# Altium PCB PC110-itx.PcbDoc (part 10 of 16)
Units mm, origin at the board's own origin, x right, y up, seen from the top; angles counter-clockwise.
Board outline 170 x 170 mm, 16 copper layers (FC1, FC2, FC3, FC4, IP1, IC1, IC2, IP2, IP3, IC3, IC4, IP4, BC4, BC3, BC2, BC1), stack 3.903 mm thick; 935 components, 1357 nets, 4698 pads, 3240 vias.
Unrouted connection lines stored in the file: 552.
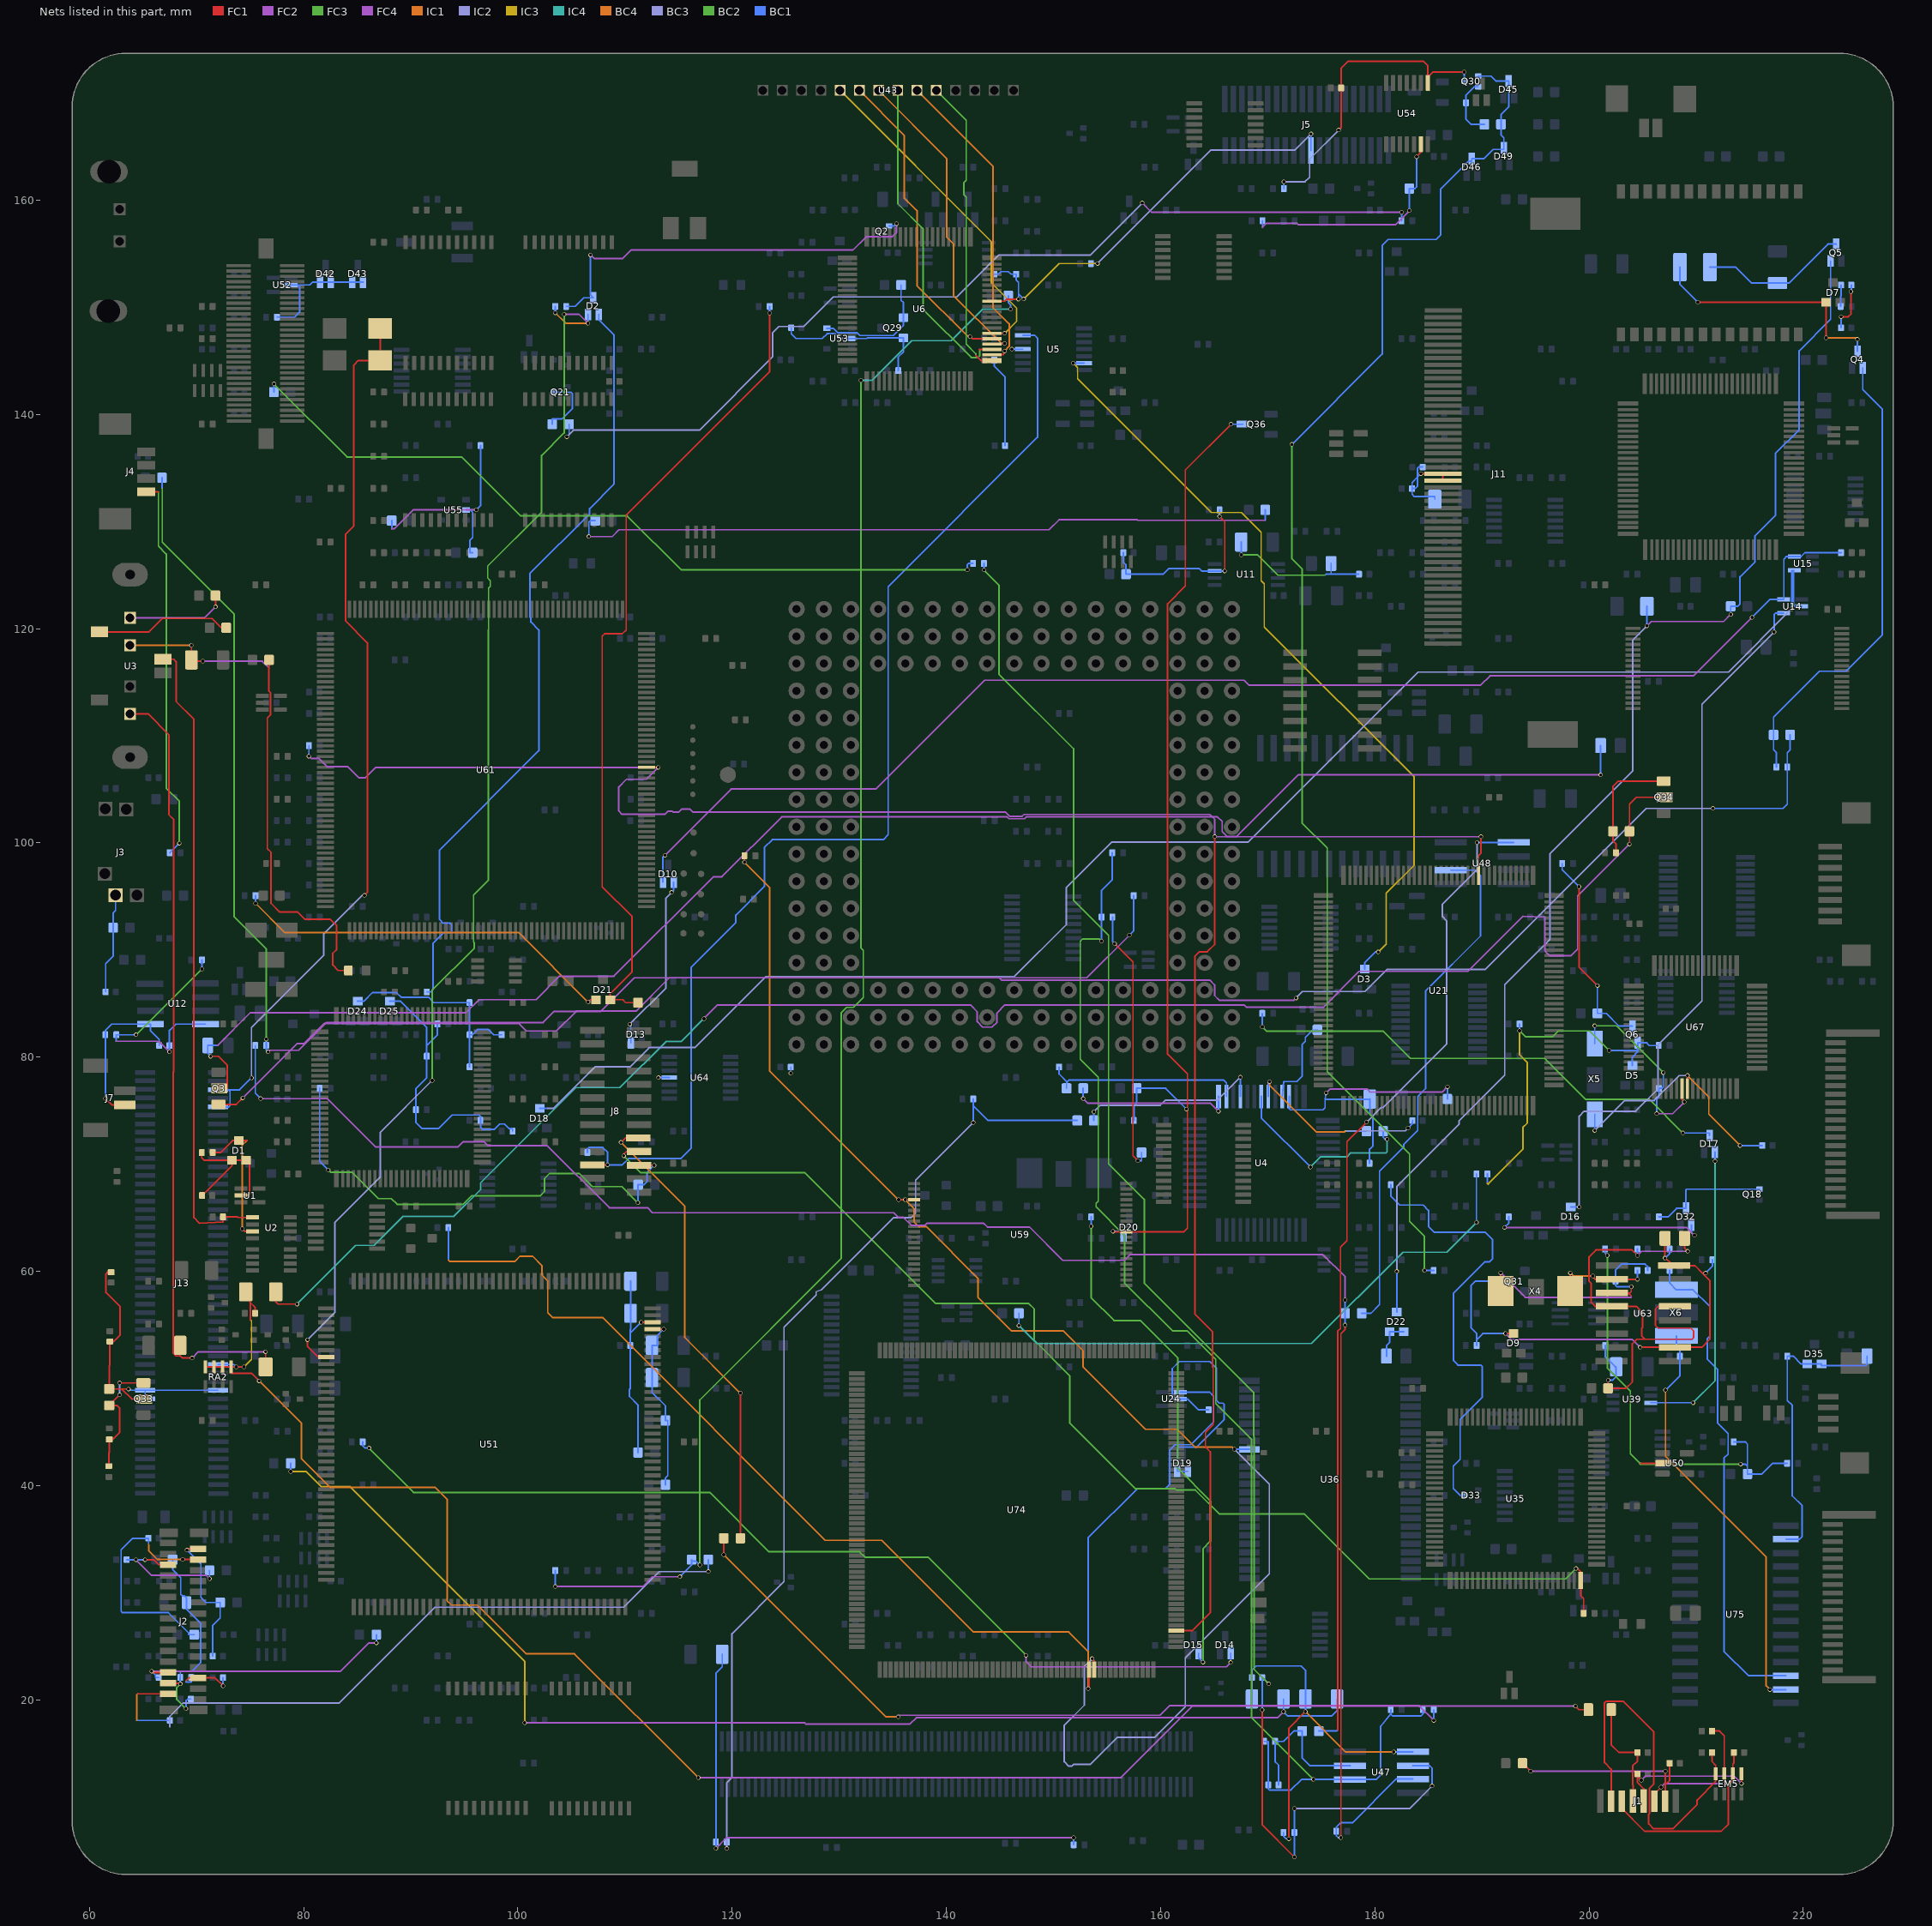
[diagram p23: the nets of this part, all layers, seen from the top]

## Via types
v1: diameter 0.4, hole 0.3, FC1 to BC1, 3240 vias

## Nets (pads, with @x,y where several pads share a name; then routed paths per layer and width w, separated by ;. In a path a pad name is that pad's centre, name@x,y a point inside that pad or via, vN(x,y) a via of type N, cw(c..) or ccw(c..) an arc to the next point about the centre after c; other vN are vias at no path point) (continued)
M38_SEG4: U6.66 U43.5 | length 31.2
  FC1 w0.15: U6.66@144.26,147.575 v1(145.44,147.575)
  IC3 w0.15: U43.5@130.07,170.26 144.196,156.134 144.196,152.286 146.558,149.923 146.558,148.693 v1(145.44,147.575)
M38_SEG5: U6.65 U43.6 | length 29.5
  FC1 w0.15: v1(142.215,147.278) 142.418,147.075 U6.65@144.26,147.075
  IC1 w0.15: U43.6@131.87,170.26 136.068,166.062 136.068,160.223 137.262,159.029 137.262,152.028 142.011,147.278 v1(142.215,147.278)
M38_SEG6: U6.64 U43.7 | length 29.9
  FC1 w0.15: U6.64@144.26,146.575 145.381,146.575 v1(145.44,146.634)
  IC1 w0.15: U43.7@133.67,170.26 140.03,163.9 140.03,156.566 140.666,155.93 140.666,151.091 145.123,146.634 v1(145.44,146.634)
M38_SEG7: U6.63 U43.8 | length 30.4
  FC1 w0.15: 143.104,146.05 143.079,146.075 U6.63@144.26,146.075
  FC3 w0.15: U43.8@135.47,170.26 135.47,159.678 137.846,157.302 137.846,149.784 142.316,145.313 142.951,145.313 143.104,145.466 143.104,146.05
M38_SEG8: U6.62 U43.9 | length 29.5
  FC1 w0.15: U6.62@144.26,145.575 145.321,145.575 v1(145.44,145.923)
  IC1 w0.15: U43.9@137.27,170.26 144.348,163.182 144.348,149.988 145.872,148.464 145.872,146.355 v1(145.44,145.923)
M38_SEG9: U6.61 U43.10 | length 28.2
  FC1 w0.15: 142.748,145.533 143.256,145.025 U6.61@144.26,145.025
  FC3 w0.15: U43.10@139.07,170.26 141.859,167.471 141.859,161.85 141.63,161.62 141.63,160.527 141.859,160.298 141.859,146.558 142.748,145.669 142.748,145.533
M38_VREF: C216.1 C223.2 J5.31 R41.1 U6.72 | length 43.2
  FC1 w0.15: U6.72@144.26,150.575 145.44,150.575 145.631,150.766 v1(146.735,150.766)
  IC2 w0.15: v1(154.108,154.09) 164.686,164.668 172.516,164.668 v1(174.04,166.192)
  IC3 w0.15: v1(147.218,150.774) 150.534,154.09 v1(154.108,154.09)
  BC1 w0.15: C216.1@144.48,153.09 144.839,153.09 145.085,153.336 145.795,153.336 146.042,153.09 C223.2@146.52,153.09 146.52,152.54 146.735,152.325 146.735,151.258 ; v1(146.735,150.766) 146.735,151.258 ; v1(147.218,150.774) 146.735,151.258 ; R41.1@153.51,154.09 v1(154.108,154.09) ; J5.31@174.04,164.65 v1(174.04,166.192)
MEMCS16#: R316.2 U21.119 U61.27 U74.160 | length 208.1
  FC1 w0.15: U61.27@112.028,107.057 v1(113.108,107.057) ; U74.160@161.458,26.469 162.966,26.469 164.643,28.146 164.643,43.162 164.186,43.619 164.186,44.984 164.908,45.706 164.908,51.013 164.846,51.075 164.846,54.381 163.195,56.032 163.195,89.408 163.626,89.839 164.363,89.839 165.049,90.526 v1(165.049,100.584) ; U21.119@189.682,96.966 189.682,98.826 189.916,99.06 v1(189.916,100.584)
  FC2 w0.15: v1(113.108,107.057) 113.102,107.057 111.989,105.943 110.134,105.943 109.419,105.228 109.419,102.976 109.728,102.667 113.716,102.667 114.023,102.974 114.406,102.974 114.496,102.885 115.027,102.885 115.317,103.174 116.027,103.174 116.316,102.885 145.5,102.885 145.897,102.488 147.067,102.488 147.243,102.665 164.592,102.665 165.049,102.207 v1(165.049,100.584) v1(189.916,100.584)
  FC4 w0.15: v1(80.49,108.102) 80.693,107.899 81.407,107.899 82.169,107.137 84.099,107.137 85.141,106.096 85.776,106.096 86.737,107.057 v1(113.108,107.057)
  BC1 w0.15: v1(80.49,108.102) R316.2@80.49,109.09
MEMR#: R322.1 U36.16 U59.24 U74.145 | length 138.2
  FC1 w0.15: v1(121.154,98.196) R322.1@121.154,98.806 ; v1(135.545,66.69) v1(136.169,66.69) U59.24@137,66.69 ; v1(153.619,23.851) 153.808,23.662 U74.145@153.808,22.819
  IC1 w0.15: v1(121.154,98.196) 123.495,95.856 123.495,78.74 v1(135.545,66.69)
  BC4 w0.15: v1(136.169,66.69) 136.984,65.876 136.984,64.618 137.415,64.186 138.125,64.186 142.951,59.36 142.951,57.582 146.075,54.458 150.901,54.458 152.75,52.61 152.75,51.112 158.598,45.264 161.543,45.264 163.194,43.612 166.681,43.612 v1(166.885,43.409)
  BC3 w0.15: v1(153.619,23.851) 152.883,23.114 152.883,19.507 151.003,17.628 151.003,14.224 151.409,13.818 151.714,13.818 151.892,13.995 153.467,13.995 155.981,16.51 159.461,16.51 162.306,19.355 162.306,23.927 170.155,31.775 170.155,40.139 166.904,43.39 v1(166.885,43.409)
  BC1 w0.15: v1@166.904,43.39 U36.16@168.29,43.39
MEMW#: R324.1 U24.1 U74.144 | length 123.6
  FC1 w0.15: v1@153.308,21.126 U74.144@153.308,22.819
  BC4 w0.15: 93.51,61.074 93.652,60.932 99.715,60.932 100.198,61.414 101.374,61.414 102.235,60.554 102.235,59.665 102.794,59.106 102.794,56.134 103.226,55.702 107.899,55.702 128.701,34.9 133.984,34.9 142.545,26.34 151.435,26.34 153.238,24.536 v1(153.238,21.056)
  BC1 w0.15: 93.51,61.074 R324.1@93.51,64.09 ; v1(153.238,21.056) v1@153.238,21.196 ; v1@153.308,21.126 v1@153.238,21.196 ; U24.1@161.85,48.74 164.569,48.74 164.922,48.387 164.922,45.923 162.824,43.825 161.351,43.825 160.833,43.307 160.833,40.114 160.426,39.708 157.818,39.708 153.238,35.128 v1@153.238,21.196
MIC_in_pin: C6.2 J3.4 L13.2 | length 9.4
  BC1 w0.15: C6.2@61.52,86.09 61.52,88.722 62.213,89.415 L13.2@62.213,92.09 62.213,93.472 62.442,93.702 J3.4@62.442,95.125
MIC_J17: J4.1 R30.2 | length 36
  FC1 w0.15: J4.1@65.3,132.77 66.442,132.77
  FC3 w0.15: 66.442,132.77 66.446,132.766 66.446,127.711 67.183,126.975 67.183,105.101 68.398,103.886 v1(68.398,99.974)
  BC1 w0.15: R30.2@67.49,99.09 67.513,99.09 v1(68.398,99.974)
MN192_VSEN#: C226.2 J8.16 R277.2 U5.11 | length 48.1
  FC1 w0.15: J8.16@111.3,69.9 v1(112.725,69.9)
  BC2 w0.15: v1(82.296,69.469) 82.499,69.266 84.506,69.266 86.97,66.802 88.189,66.802 88.722,66.269 94.895,66.269 95.682,67.056 102.083,67.056 102.489,67.462 102.489,68.682 102.946,69.139 105.74,69.139 106.959,67.92 109.697,67.92 v1(111.201,66.416)
  BC1 w0.15: R277.2@81.49,77.09 81.49,70.275 v1(82.296,69.469) ; v1(111.201,66.416) 111.225,66.439 C226.2@111.225,68.09 111.76,68.09 112.065,68.395 112.065,69.24 v1(112.725,69.9) ; v1(146.12,146.09) U5.11@147.137,146.09
MN195_U1RD#: J8.3 R128.2 U5.13 | length 110.1
  FC1 w0.15: J8.3@106.95,69.95 v1(108.382,69.95)
  BC1 w0.15: R128.2@106.49,71.09 106.49,71.425 106.642,71.577 107.925,71.577 108.382,71.12 v1(108.382,69.95) 109.747,69.95 110.333,70.536 115.189,70.536 116.18,71.526 116.18,88.415 120.348,92.584 120.348,93.271 123.012,95.936 123.012,99.568 123.749,100.305 134.112,100.305 134.569,100.762 134.569,123.927 148.514,137.871 148.514,147.117 148.241,147.39 U5.13@147.137,147.39
Modem_Audio_Out: C89.1 R32.1 | length 76.1
  FC1 w0.15: v1(119.225,33.553) C89.1@119.225,35.09
  IC1 w0.15: v1(119.225,33.553) 134.363,18.415 v1(135.509,18.415)
  FC4 w0.15: v1(135.509,18.415) 135.662,18.568 159.945,18.568 160.833,19.456 184.138,19.456 v1(185.51,18.085)
  BC1 w0.15: v1(185.51,18.085) R32.1@185.51,19.09
Modem_VSDA#: J8.17 R127.1 U35.75 | length 116.2
  FC1 w0.15: v1(109.88,70.794) 109.88,70.946 110.134,71.2 J8.17@111.3,71.2 ; v1(198.78,32.258) 198.933,32.258 199.22,31.971 U35.75@199.22,31.15 199.22,29.734 199.49,29.464 R127.1@199.49,28.09
  BC2 w0.15: v1(109.88,70.794) 111.459,69.215 126.796,69.215 139.013,56.998 147.701,56.998 148.209,56.49 148.209,53.569 151.515,50.262 151.515,45.868 157.676,39.708 161.359,39.708 161.468,39.599 163.246,39.599 165.499,37.345 173.424,37.345 179.476,31.293 197.815,31.293 v1(198.78,32.258)
Net-(C1--): C1.2 U2.1 U3.1 | length 60.1
  FC1 w0.15: U3.1@66.85,117.155 67.869,117.155 68.097,116.926 68.097,113.208 69.748,111.557 69.748,65.024 70.282,64.491 72.48,64.618 C1.2@72.48,65.09 73.838,65.09 73.888,65.04 U2.1@75.25,65.04
Net-(C4-+): C4.1 D1.1 D1.3 R4.1 U1.2 | length 13.5
  FC1 w0.15: R4.1@70.49,71.09 70.49,70.589 70.714,70.365 D1.3@73.3,70.365 ; C4.1@70.52,67.09 70.536,67.09 73.3,69.854 D1.3@73.3,70.365 ; U1.2@74.15,67.09 74.786,67.09 74.955,67.259 74.955,70.365 D1.1@74.625,70.365 D1.3@73.3,70.365
Net-(C7-+): C7.1 J1.7 L1.2 | length 18.6
  FC1 w0.15: L1.2@193.788,14.09 193.802,14.09 v1(194.557,13.335) ; J1.7@207.11,10.55 207.11,12.09 ; v1(207.11,13.335) 207.11,12.09 ; C7.1@207.52,14.09 207.52,12.5 207.11,12.09
  FC2 w0.15: v1(194.557,13.335) v1(207.11,13.335)
Net-(C10-+): C10.1 C23.1 L7.1 | length 114.7
  IC3 w0.15: v1(78.787,41.326) 80.213,41.326 81.61,39.929 84.303,39.929 100.635,23.597 v1(100.635,17.856)
  FC4 w0.15: v1(100.635,17.856) 126.771,17.856 126.874,17.753 136.61,17.753 137.195,18.338 170.916,18.338 v1(171.475,18.898)
  BC1 w0.15: v1(78.787,41.326) L7.1@78.787,42.09 ; C10.1@171.475,20.09 v1(171.475,18.898) 171.881,18.491 175.971,18.491 176.475,18.995 C23.1@176.475,20.09
Net-(C10--): C10.2 C23.2 C154.2 R227.2 U47.1 | length 36.9
  FC1 w0.15: v1(171.983,7.036) 171.983,17.368 v1(173.525,18.91)
  BC4 w0.15: v1(173.525,18.91) 177.297,15.138 v1(181.762,15.138)
  BC1 w0.15: C10.2@168.525,20.09 168.525,21.082 168.52,21.087 C154.2@168.52,22.09 168.52,22.758 168.926,23.165 173.119,23.165 173.525,22.758 C23.2@173.525,20.09 v1(173.525,18.91) ; R227.2@171.474,7.627 171.474,7.266 171.704,7.036 v1(171.983,7.036) ; v1(181.762,15.138) 181.782,15.158 U47.1@183.544,15.158
Net-(C11-+): C11.1 C50.2 R72.1 U11.7 | length 17.5
  FC1 w0.15: v1(165.506,130.48) 165.989,129.997 v1(165.989,125.39)
  BC1 w0.15: C50.2@156.52,127.09 156.52,126.214 156.775,125.959 C11.1@156.775,125.09 160.244,125.09 160.757,125.603 163.617,125.603 163.83,125.39 U11.7@165.05,125.39 v1(165.989,125.39) ; v1(165.506,130.48) 165.51,130.483 R72.1@165.51,131.09
Net-(C12-+): C12.1 U4.1 | length 15.5
  FC2 w0.15: v1(152.775,76.124) 153.207,75.692 164.668,75.692 v1(165.4,74.96)
  BC1 w0.15: v1(152.775,76.124) C12.1@152.775,77.09 ; v1(165.4,74.96) U4.1@165.4,76.34
Net-(C12--): C12.2 C24.2 U4.2 | length 18.7
  BC1 w0.15: C24.2@150.52,79.09 150.52,78.429 151.225,77.724 151.225,77.622 ; C12.2@151.225,77.09 151.225,77.622 ; U4.2@166.15,76.34 166.15,77.597 165.871,77.876 151.479,77.876 151.225,77.622
Net-(C13-+): C13.1 U48.6 | length 48.9
  BC1 w0.15: C13.1@178.775,56.09 179.629,56.09 180.442,56.903 180.442,69.353 182.716,71.628 182.716,71.871 183.998,73.152 183.998,76.328 184.734,77.064 184.734,86.182 189.865,91.313 189.865,96.972 189.382,97.455 U48.6@187.1,97.455
Net-(C13--): C13.2 R217.2 R218.2 U47.3 | length 177.1
  FC1 w0.15: v1(176.835,7.137) 176.835,54.197 177.225,54.587 v1(177.225,54.993)
  FC2 w0.15: v1(75.997,76.124) 82.22,76.124 86.715,71.629 94.412,71.629 94.894,72.111 96.825,72.111 97.207,71.729 102.744,71.729 108.534,65.938 112.116,65.938 112.573,65.481 135.103,65.481 135.534,65.05 135.991,65.05 136.741,64.3 137.994,64.3 138.185,64.491 143.485,64.491 143.84,64.135 147.777,64.135 150.876,61.036 156.616,61.036 157.15,61.57 175.158,61.57 177.225,59.503 v1(177.225,57.328)
  BC1 w0.15: R217.2@75.49,81.09 75.49,76.631 v1(75.997,76.124) ; v1(176.835,7.137) 176.579,7.137 176.401,7.315 R218.2@176.401,7.747 176.401,8.128 176.807,8.534 177.902,8.534 181.975,12.608 U47.3@183.544,12.608 ; v1(177.225,54.993) C13.2@177.225,56.09 v1(177.225,57.328)
Net-(C15--): C15.2 R25.2 R26.2 R32.2 R34.2 R35.2 U47.6 | length 125
  FC3 w0.15: v1(154.49,90.83) 154.287,91.033 152.705,91.033 152.502,90.83 152.502,79.807 154.178,78.13 154.178,66.545 153.978,66.345 153.978,66.037 156.642,63.373 156.642,58.928 161.112,54.458 162.484,54.458 165.151,51.791 165.151,47.663 168.478,44.335 168.478,18.364 v1(174.269,12.573)
  BC1 w0.15: v1(154.49,90.83) R34.2@154.49,93.09 154.49,95.58 155.49,96.58 R26.2@155.49,99.09 ; R25.2@169.67,16.129 170.053,16.129 C15.2@170.053,12.065 170.053,11.684 170.155,11.582 172.161,11.582 173.152,12.573 v1(174.269,12.573) U47.6@177.694,12.573 180.111,12.573 180.543,13.005 180.543,17.543 181.49,18.672 ; R35.2@181.49,19.09 181.49,18.672 ; R32.2@184.49,19.09 184.49,18.689 184.302,18.501 181.661,18.501 181.49,18.672
Net-(C18--): C18.2 R34.1 | length 24.8
  FC1 w0.15: v1(155.713,90.602) 157.429,88.886 157.429,70.79 v1(157.886,70.333)
  BC1 w0.15: R34.1@155.51,93.09 155.51,90.805 v1(155.713,90.602) ; v1(157.886,70.333) 158.217,70.333 158.225,70.341 C18.2@158.225,71.09
Net-(C20--): C20.2 C21.2 U4.8 | length 19.6
  BC4 w0.15: v1(170.18,77.724) 170.18,77.38 174.535,73.025 177.165,73.025 177.267,73.127
  BC3 w0.15: 177.23,73.09 177.267,73.127 182.855,73.127 v1(183.109,73.381)
  BC1 w0.15: U4.8@170.05,76.34 170.05,77.594 v1(170.18,77.724) ; 177.23,73.09 C21.2@179.225,73.09 ; v1(183.109,73.381) 183.49,73.762 C20.2@183.52,74.09
Net-(C21-+): C21.1 U4.7 | length 18.4
  IC4 w0.15: v1(173.99,69.748) 174.93,70.689 177.393,70.689 177.773,71.069 181.051,71.069 181.153,71.171 v1(181.153,72.339)
  BC1 w0.15: U4.7@169.4,76.34 169.4,74.338 v1(173.99,69.748) ; C21.1@180.775,73.09 180.775,72.542 180.978,72.339 v1(181.153,72.339)
Net-(C22-+): C22.1 U4.10 | length 8.5
  BC1 w0.15: U4.10@171.35,76.34 171.501,77.72 172.72,77.72 173.228,78.228 173.228,81.2 173.511,81.483 173.511,81.841 174.195,82.525 174.638,82.525 C22.1@174.638,82.55
Net-(C25-+): C25.1 Q6.3 R36.2 | length 19.1
  FC1 w0.15: v1(199.06,95.92) 199.06,88.405 v1(200.775,86.69)
  BC1 w0.15: R36.2@197.49,98.09 197.49,97.49 v1(199.06,95.92) ; v1(200.775,86.69) C25.1@200.775,84.09 201.609,84.09 202.794,82.906 204.05,82.906 Q6.3@204.05,82.89
Net-(C30--): C30.2 C36.2 C48.1 L3.2 U51.158 | length 18.9
  FC1 w0.15: v1(111.506,55.255) U51.158@112.57,55.255
  BC1 w0.15: C36.2@110.525,59.09 C30.2@110.525,56.09 110.525,54.604 110.48,54.559 110.48,54.229 ; L3.2@111.212,43.09 111.212,47.53 110.414,48.329 110.414,48.993 110.48,49.059 C48.1@110.48,53.09 110.48,54.229 ; v1(111.506,55.255) 110.48,54.229
Net-(C46-+): C46.1 Q3.3 R76.1 | length 167.5
  FC1 w0.15: Q3.3@72.05,75.59 73.71,75.59 v1(74.32,76.2)
  FC2 w0.15: v1(74.32,76.2) 79.375,81.255 80.01,81.255 81.915,83.16 100.076,83.16 100.787,82.448 103.607,82.448 105.461,84.303 111.023,84.303 114.135,87.415 144.919,87.415 145.136,87.198 164.592,87.198 165.049,86.741 165.049,85.75 165.481,85.319 172.441,85.319 v1(172.644,85.522)
  IC2 w0.15: v1(172.644,85.522) 173.253,86.131 179.07,86.131 181.127,88.189 190.304,88.189 205.341,103.226 v1(211.557,103.226)
  BC1 w0.15: v1(211.557,103.226) 218.104,103.226 218.51,103.632 R76.1@218.51,107.09 218.51,108.433 218.775,108.698 C46.1@218.775,110.09
Net-(C46--): C46.2 Q4.2 R76.2 | length 43.8
  BC1 w0.15: R76.2@217.49,107.09 217.49,108.433 217.225,108.698 C46.2@217.225,110.09 217.225,111.739 221.513,116.027 223.977,116.027 227.381,119.431 227.381,140.485 225.55,142.316 Q4.2@225.55,144.34
Net-(C47-+): C47.1 L4.1 Q5.3 | length 13.9
  BC1 w0.15: L4.1@211.28,153.75 213.69,153.75 215.17,152.27 C47.1@217.59,152.27 218.666,152.27 222.301,155.905 223.05,155.905 Q5.3@223.05,155.89
Net-(C49--): C49.2 Q3.2 R68.2 | length 151.4
  FC1 w0.15: v1(71.323,80.085) 72.036,80.085 72.873,79.248 72.873,77.09 Q3.2@72.138,77.09
  FC4 w0.15: 71.958,81.102 75.006,84.15 95.148,84.15 96.368,85.369 101.702,85.369 103.886,87.554 108.966,87.554 118.262,96.85 119.05,96.85 124.638,102.438 145.667,102.438 145.847,102.258 147.297,102.258 147.477,102.438 165.314,102.438 165.745,102.006 165.745,101.063 166.218,100.59 167.088,100.59 172.847,106.35 v1(201.087,106.35)
  BC1 w0.15: v1(71.323,80.085) 71.05,80.358 C49.2@71.05,81.09 71.05,81.102 71.958,81.102 ; v1(201.087,106.35) R68.2@201.087,109.09
Net-(C60-Pad1): C60.1 C63.2 | length 66.8
  FC4 w0.15: v1(106.629,128.6) 108.814,128.6 109.449,129.235 149.581,129.235 150.52,130.175 157.81,130.175 157.861,130.124 169.748,130.124
  BC1 w0.15: v1(106.629,128.6) 106.629,129.946 106.773,130.09 C63.2@107.225,130.09 ; 169.748,130.124 169.775,130.151 C60.1@169.775,131.09
Net-(C65-+): C65.1 C67.1 | length 8.4
  BC1 w0.15: C67.1@144.48,145.09 144.48,144.505 145.48,143.505 C65.1@145.48,137.09
Net-(C85-+): C85.1 R24.1 R121.1 U12.4 | length 23
  FC2 w0.15: 62.509,81.483 66.497,81.483 v1(67.48,80.5)
  BC2 w0.15: v1(64.361,82.09) v1(70.51,88.239)
  BC1 w0.15: 62.51,81.484 R121.1@62.51,82.09 v1(64.361,82.09) ; v1(67.48,80.5) C85.1@67.48,81.09 67.48,82.499 68.071,83.09 U12.4@70.85,83.09 ; v1(70.51,88.239) R24.1@70.51,89.09
Net-(C85--): C85.2 J7.2 R121.2 U12.5 | length 15.2
  FC1 w0.15: v1(61.49,76.138) 62.078,75.55 J7.2@63.287,75.55
  BC1 w0.15: v1(61.49,76.138) R121.2@61.49,82.09 61.49,82.499 62.081,83.09 U12.5@65.7,83.09 65.7,82.481 66.52,81.661 C85.2@66.52,81.09
Net-(C89--): C89.2 J8.18 | length 43.4
  FC1 w0.15: v1(109.626,72.044) 110.033,72.45 J8.18@111.25,72.45 ; C89.2@120.775,35.09 v1(120.775,48.643)
  IC1 w0.15: v1(109.626,72.044) 115.57,66.1 115.57,53.848 v1(120.775,48.643)
Net-(C92--): C92.2 F3.1 J13.16 L12.1 RA2.1 RA2.2 RA2.3 RA2.4 | length 167.4
  FC1 w0.15: RA2.4@70.825,51.09 RA2.3@71.625,51.09 RA2.2@72.425,51.09 RA2.1@73.225,51.09 RA2.1@73.225,51.079 ; v1(74.422,51.079) v1(73.711,51.079) RA2.1@73.225,51.079 ; F3.1@74.6,58.09 74.6,57.522 75.032,57.09 ; 75.032,55.499 75.032,57.09 ; C92.2@75.48,56.09 75.48,56.642 75.032,57.09 ; v1(75.844,49.784) 75.133,50.495 73.225,50.495 RA2.1@73.225,51.079 ; v1(198.73,19.431) 199.071,19.09 L12.1@199.938,19.09
  FC2 w0.15: v1(116.84,12.751) 156.312,12.751 162.992,19.431 v1(198.73,19.431)
  IC1 w0.15: v1(75.844,49.784) 79.781,45.847 79.781,42.545 82.474,39.853 92.278,39.853 93.396,38.735 93.396,29.261 93.802,28.854 96.241,28.854 100.787,24.308 105.283,24.308 v1(116.84,12.751)
  IC3 w0.15: v1(74.422,51.079) 75.133,51.791 75.133,55.397 75.032,55.499
  BC1 w0.15: J13.16@72.008,51.303 73.488,51.303 v1(73.711,51.079)
Net-(C129-+): C129.1 C272.1 F4.2 J11.25 J11.26 | length 10.2
  FC1 w0.15: v1(184.302,134.472) J11.26@186.358,134.472 J11.25@186.358,133.822
  BC1 w0.15: v1(184.302,134.472) 183.972,134.142 ; C272.1@184.48,135.09 184.099,135.09 183.972,134.963 183.972,134.142 ; F4.2@185.6,132.09 185.6,132.334 183.693,132.334 183.48,132.547 C129.1@183.48,133.09 ; C129.1@183.48,133.09 183.763,133.09 183.972,133.299 183.972,134.142 ; C129.1@183.48,133.09 183.48,133.65 183.972,134.142
Net-(C135-+): C135.1 D35.1 D35.3 R200.1 U75.16 | length 27.7
  BC1 w0.15: U75.16@218.38,35.01 219.659,35.01 219.888,35.239 219.888,38.125 218.973,39.04 218.973,47.492 218.51,47.955 R200.1@218.51,52.09 219.075,52.09 219.8,51.365 D35.1@220.375,51.365 D35.3@221.7,51.365 221.7,51.206 225.848,51.206 225.95,51.308 C135.1@225.95,52.09
Net-(C147-+): C147.1 U48.1 | length 93.9
  FC1 w0.15: 176.531,17.192 176.531,54.418 176.798,54.685 176.798,62.27 177.394,62.865 177.394,72.111 v1(179.222,73.939)
  BC3 w0.15: v1(179.222,73.939) 180.594,75.311 180.797,75.311 186.69,81.204 186.69,92.735 186.309,93.116 186.309,94.285 189.535,97.511 v1(189.535,100.04)
  BC1 w0.15: C147.1@174.775,17.09 176.428,17.09 176.531,17.192 ; v1(189.535,100.04) U48.1@192.95,100.04
Net-(C147--): C15.1 C147.2 R25.1 U47.7 | length 14.4
  BC1 w0.15: C15.1@171.013,12.065 171.013,13.919 170.69,14.242 R25.1@170.69,16.129 171.475,16.129 172.436,17.09 C147.2@173.225,17.09 173.225,14.572 173.939,13.858 U47.7@177.694,13.858
Net-(C150-+): C150.1 U4.4 | length 17.6
  IC2 w0.15: v1(153.775,74.905) 154.385,75.514 159.966,75.514 160.45,75.998 165.318,75.998 v1(167.45,78.13)
  BC1 w0.15: C150.1@153.775,74.09 v1(153.775,74.905) ; U4.4@167.45,76.34 v1(167.45,78.13)
Net-(C150--): C150.2 R221.1 R225.1 | length 91.5
  BC3 w0.15: v1(119.507,6.121) 119.507,12.268 119.99,12.751 119.99,26.187 124.841,31.039 124.841,54.788 127.846,57.793 127.846,58.115 128.32,58.267 135.077,65.024 136.728,65.024 137.135,65.43 137.135,68.513 v1(142.51,73.889)
  BC1 w0.15: v1(119.507,6.121) R225.1@119.507,6.731 ; v1(142.51,73.889) 142.51,75.489 ; R221.1@142.51,76.09 142.51,75.489 ; C150.2@152.225,74.09 143.909,74.09 142.51,75.489
Net-(C153-Pad1): C153.1 R37.2 R217.1 | length 146.5
  FC3 w0.15: 66.802,133.121 66.802,128.092 73.508,121.387 73.508,93.116 76.505,90.119 v1(76.505,81.686)
  FC4 w0.15: v1(76.69,80.49) 76.849,80.648 79.531,80.648 82.118,83.236 102.358,83.236 103.399,84.277 107.747,84.277 110.884,87.415 153.109,87.415 v1(157.084,91.389)
  BC1 w0.15: C153.1@66.775,134.09 66.775,133.148 66.802,133.121 ; v1(76.505,81.686) 76.505,81.09 R217.1@76.51,81.09 76.51,80.67 v1(76.69,80.49) ; v1(157.084,91.389) 157.49,91.796 R37.2@157.49,95.09
Net-(C154-+): C154.1 R220.1 R227.1 U47.2 | length 156.3
  FC1 w0.15: v1(169.48,19.064) 169.48,8.348 v1(172.494,5.334)
  FC3 w0.15: v1(143.51,125.476) 144.907,124.079 144.907,115.764 151.867,108.804 151.867,94.666 155.143,91.389 155.143,70.053 158.471,66.726 158.471,58.903 168.705,48.668 168.705,44.595 168.732,44.569 168.732,22.852 v1(170.096,21.488)
  IC2 w0.15: v1(172.494,9.855) 183.236,9.855 v1(185.344,11.963)
  BC1 w0.15: v1(143.51,125.476) R220.1@143.51,126.09 ; v1(169.48,19.064) C154.1@169.48,22.09 169.494,22.09 v1(170.096,21.488) ; v1(172.494,5.334) R227.1@172.494,7.627 v1(172.494,9.855) ; U47.2@183.544,13.858 185.115,13.858 185.344,13.629 v1(185.344,11.963)
Net-(C160--): C160.2 C166.1 R224.1 U4.11 | length 29.4
  FC2 w0.15: v1(175.463,76.683) 175.818,77.038 179.273,77.038 179.577,76.733 186.267,76.733 v1(186.775,77.241)
  BC1 w0.15: U4.11@172,76.34 172,75.184 172.102,75.082 175.158,75.082 175.362,75.286 175.362,76.073 ; v1(175.463,76.683) 175.362,76.073 ; R224.1@179.51,70.09 179.51,71.408 179.832,71.73 179.832,74.42 179.525,74.727 C160.2@179.525,76.073 ; C160.2@179.525,76.09 C160.2@179.525,76.073 ; C166.1@186.775,76.09 v1(186.775,77.241) ; 175.362,76.073 C160.2@179.525,76.073
Net-(C162-+): C162.1 R222.2 R225.2 | length 52.8
  FC2 w0.15: v1(118.487,6.131) 119.493,7.137 v1(151.888,7.137)
  BC1 w0.15: v1(118.487,6.131) R225.2@118.487,6.731 118.487,22.499 119.077,23.089 C162.1@119.077,24.257 ; R222.2@151.888,6.477 v1(151.888,7.137)
Net-(C163--): C163.2 EM5.3 J1.6 | length 13.4
  FC1 w0.15: J1.6@206.11,10.55 206.11,11.252 v1(206.72,11.862) ; C163.2@211.48,17.09 212.197,17.09 212.625,16.662 EM5.3@212.625,13.09 212.625,12.194 v1(212.623,12.192)
  FC4 w0.15: v1(206.72,11.862) 207.05,12.192 v1(212.623,12.192)
Net-(C164-Pad2): C164.2 R220.2 | length 73.7
  BC2 w0.15: v1(77.225,142.85) 84.044,136.031 94.753,136.031 100.254,130.531 110.211,130.531 115.24,125.501 v1(141.961,125.501)
  BC1 w0.15: C164.2@77.225,142.09 v1(77.225,142.85) ; v1(141.961,125.501) 141.961,125.984 142.067,126.09 R220.2@142.49,126.09
Net-(C167--): C167.2 EM5.4 J1.2 | length 35.4
  FC1 w0.15: J1.2@202.06,10.55 202.06,13.535 201.447,14.148 201.447,19.736 201.574,19.863 203.2,19.863 206.045,17.018 206.045,12.167 205.638,11.76 205.638,9.398 205.562,9.322 205.562,8.433 206.027,7.968 207.815,7.968 210.083,10.236 210.083,10.654 211.825,12.395 EM5.4@211.825,13.09 211.825,13.894 211.48,14.239 C167.2@211.48,15.09
Net-(C168--): C168.2 U3.3 | length 12.7
  FC1 w0.15: U3.3@60.95,119.705 65.557,119.705 66.802,120.95 71.455,120.95 72.315,120.09 C168.2@72.775,120.09
Net-(C170-+): C170.1 EM5.1 J1.5 | length 13.9
  FC1 w0.15: C170.1@204.52,13.09 204.52,12.776 ; v1(204.876,12.497) 204.597,12.776 204.52,12.776 ; J1.5@205.11,10.55 205.11,11.702 204.52,12.292 204.52,12.776 ; v1(214.224,12.192) 214.225,12.217 EM5.1@214.225,13.09
  FC2 w0.15: v1(204.876,12.497) 205.257,12.878 213.538,12.878 v1(214.224,12.192)
Net-(C171-+): C171.1 J2.6 L16.1 | length 25.5
  FC1 w0.15: v1(65.808,22.682) 65.927,22.563 J2.6@67.347,22.563
  FC2 w0.15: v1(65.808,22.682) 83.439,22.682 86.081,25.324 v1(86.787,25.324)
  BC1 w0.15: v1(65.808,22.682) 66.167,22.323 66.167,22.09 C171.1@66.48,22.09 ; v1(86.787,25.324) L16.1@86.787,26.09
Net-(C176-+): C176.1 C188.1 J2.4 L9.1 R234.2 | length 20
  FC1 w0.15: J2.4@67.347,21.563 v1@68.404,21.563
  FC3 w0.15: v1@68.404,21.563 v1(68.49,21.49) ; v1@68.478,21.488 v1(68.49,21.49) ; v1(69.012,19.177) 68.148,20.041 68.148,21.148 v1(68.49,21.49)
  BC1 w0.15: C176.1@67.775,33.09 67.775,32.156 68.524,31.408 68.524,29.87 68.668,29.726 68.851,29.726 69.062,29.515 L9.1@69.062,29.09 69.062,28.473 70.383,27.152 70.383,23.47 69.596,22.682 68.617,22.682 68.49,22.555 R234.2@68.49,22.09 ; v1@68.478,21.488 68.478,22.09 R234.2@68.49,22.09 ; v1(68.49,21.49) R234.2@68.49,22.09 ; v1(69.012,19.177) 69.012,19.914 69.188,20.09 C188.1@69.48,20.09
Net-(C177--): C177.2 J2.27 L18.1 | length 22.7
  FC1 w0.15: v1(68.707,33.113) J2.27@70.147,33.113
  BC4 w0.15: 65.52,34.505 65.532,34.493 65.532,33.934 66.354,33.113 v1(68.707,33.113)
  BC1 w0.15: 65.52,34.505 C177.2@65.52,35.09 64.046,35.09 62.962,34.006 62.962,28.277 63.094,28.145 67.384,28.145 69.266,26.264 69.266,26.09 L18.1@69.788,26.09
Net-(C189--): C189.2 J2.2 L14.1 | length 67
  FC1 w0.15: 64.505,20.563 J2.2@67.347,20.563
  IC2 w0.15: 67.52,17.507 67.513,17.501 67.513,18.466 68.758,19.71 83.337,19.71 92.278,28.651 109.855,28.651 113.182,31.979 v1(117.788,31.979)
  BC4 w0.15: 64.414,18.11 64.414,20.472 64.505,20.563
  BC1 w0.15: 64.414,18.11 64.435,18.09 C189.2@67.52,18.09 67.52,17.507 ; v1(117.788,31.979) L14.1@117.788,33.09
Net-(C192-+): C192.1 J2.26 L11.2 | length 12.4
  FC1 w0.15: v1(65.202,33.09) 66.007,33.09 66.484,32.612 J2.26@67.347,32.612
  FC2 w0.15: v1(64.338,33.09) 65.805,31.623 70.908,31.623 v1(71.213,31.318)
  BC1 w0.15: C192.1@63.48,33.09 v1(64.338,33.09) v1(65.202,33.09) ; v1(71.213,31.318) L11.2@71.213,32.09
Net-(C193-+): C193.1 J2.5 R234.1 | length 5.7
  FC1 w0.15: 69.012,21.783 69.291,22.062 J2.5@70.147,22.062 71.728,22.062 v1(72.48,21.311)
  BC1 w0.15: 69.012,21.783 69.012,21.656 69.51,21.656 R234.1@69.51,22.09 ; v1(72.48,21.311) C193.1@72.48,22.09
Net-(C195--): C195.2 J2.29 L17.2 | length 13.3
  FC1 w0.15: v1(69.113,33.985) 69.241,34.113 J2.29@70.147,34.113
  BC1 w0.15: v1(69.113,33.985) 70.408,32.691 70.408,29.574 70.891,29.09 L17.2@72.213,29.09 72.213,27.661 71.52,26.968 C195.2@71.52,24.09
Net-(C197--): C197.2 U3.5 | length 9.5
  FC1 w0.15: v1(71.775,122.042) C197.2@71.775,123.09
  FC2 w0.15: U3.5@63.8,121.005 70.738,121.005 v1(71.775,122.042)
Net-(C198-+): C198.1 J1.4 L12.2 | length 10.8
  FC1 w0.15: L12.2@202.062,19.09 202.062,15.821 202.794,15.09 C198.1@204.52,15.09 204.52,14.299 204.064,13.843 204.064,12.081 204.11,12.035 J1.4@204.11,10.55
Net-(C199-+): C199.1 EM5.2 J1.3 | length 18.7
  FC1 w0.15: J1.3@203.06,10.55 203.06,9.868 205.19,7.738 212.335,7.738 213.004,8.407 213.004,12.076 213.425,12.497 EM5.2@213.425,13.09 213.425,14.021 213.52,14.116 C199.1@213.52,15.09
Net-(C200--): C200.2 R241.1 U3.8 | length 73.8
  FC1 w0.15: U3.8@63.8,112.055 65.466,112.055 67.412,110.109 67.412,102.641 67.869,102.184 67.869,78.664 67.818,78.613 67.818,52.367 68.075,52.11 68.475,52.11 68.475,52.124 ; C200.2@68.475,53.09 68.475,52.124 ; v1(69.596,51.918) 68.682,51.918 68.475,52.124 ; R241.1@76.45,51.09 v1(76.45,52.502)
  FC2 w0.15: v1(69.596,51.918) 70.18,52.502 v1(76.45,52.502)
Net-(C201-+): C201.1 C202.2 R238.1 U3.6 | length 51
  FC1 w0.15: v1(69.525,118.455) C201.1@69.525,117.09 69.525,116.967 v1(70.587,116.967) ; C202.2@76.775,117.09 76.759,117.09 76.759,114.173 76.905,114.027 76.905,111.963 76.607,111.665 76.607,99.466 76.952,99.121 76.952,94.361 77.764,93.548 79.451,93.548 80.137,92.862 82.499,92.862 83.083,92.279 83.083,90.067 82.728,89.712 82.728,88.595 83.233,88.09 R238.1@84.175,88.09
  FC2 w0.15: v1(70.587,116.967) 76.143,116.967 76.775,116.335 76.759,117.09 76.775,117.09
  BC4 w0.15: U3.6@63.8,118.455 v1(69.525,118.455)
Net-(C206--): C45.1 C206.2 C210.2 L6.1 U51.157 | length 17.1
  FC1 w0.15: U51.157@112.57,54.605 113.609,54.605 v1(113.614,54.61)
  BC1 w0.15: v1(113.614,54.61) 113.005,54 113.005,53.09 C206.2@112.525,53.09 C210.2@112.525,50.09 112.525,48.697 113.775,47.447 C45.1@113.775,46.09 113.995,46.09 113.995,40.949 113.787,40.742 L6.1@113.787,40.09
Net-(C207-+): C207.1 R71.2 | length 53.8
  IC4 w0.15: v1(146.775,54.94) 148.451,53.264 174.092,53.264 182.626,61.798 186.715,61.798 v1(189.49,64.573)
  BC1 w0.15: v1(146.775,54.94) C207.1@146.775,56.09 ; v1(189.49,64.573) R71.2@189.49,69.09
Net-(C213-Pad2): C213.2 C214.2 R250.1 | length 14
  BC2 w0.15: v1(167.525,126.898) 169.037,126.898 170.942,124.993 175.341,124.993
  BC1 w0.15: v1(167.525,126.898) C214.2@167.525,128.09 ; 175.341,124.993 175.438,125.09 175.943,125.09 ; R250.1@175.913,126.09 175.913,125.12 175.943,125.09 ; C213.2@178.52,125.09 175.943,125.09
Net-(C224--): C224.2 D47.1 R281.1 U55.2 | length 21
  FC2 w0.15: 88.225,129.348 88.214,129.337 88.468,129.337 90.221,131.09 v1(96.125,131.09)
  BC1 w0.15: 88.225,129.348 C224.2@88.225,130.09 ; U55.2@95.16,131.09 95.558,131.09 ; D47.1@95.788,127.09 95.512,127.09 95.512,128.241 95.788,128.517 95.788,130.861 95.558,131.09 ; v1(96.125,131.09) v1@96.114,131.09 ; R281.1@96.51,137.09 96.51,131.486 v1@96.114,131.09 ; 95.558,131.09 v1@96.114,131.09
Net-(C225-+): C225.1 D45.3 D46.3 D49.3 Q30.1 R276.2 | length 132.7
  FC3 w0.15: v1(172.263,137.211) 172.263,126.53 173.213,125.581 173.213,101.869 175.555,99.527 175.555,78.649 183.24,70.964 183.24,64.684 184.633,63.291 v1(184.633,60.09)
  BC1 w0.15: v1(172.263,137.211) 180.696,145.644 180.696,155.778 181.254,156.337 185.725,156.337 186.157,156.769 186.157,161.061 188.747,163.652 189.05,163.652 D46.3@189.05,163.89 190.204,163.89 191.053,164.738 192.05,164.738 D49.3@192.05,164.89 192.05,165.837 191.775,166.112 C225.1@191.775,167.09 191.775,167.996 192.5,168.721 D45.3@192.5,171.135 191.285,171.135 190.83,171.59 Q30.1@189.65,171.59 ; v1(184.633,60.09) R276.2@185.49,60.09
Net-(C225--): C29.2 C225.2 Q30.2 | length 5.6
  BC1 w0.15: Q30.2@189.65,170.59 189.292,170.59 188.52,169.818 C29.2@188.52,169.09 188.52,167.546 188.976,167.09 C225.2@190.225,167.09
Net-(C227--): C227.2 D9.2 Q31.3 R79.1 R275.1 R284.1 U63.10 U63.16 | length 47.8
  FC1 w0.15: v1@192.213,54.215 D9.2@192.95,54.215 ; v1(204.775,52.915) U63.10@208,52.915 210.522,52.915 211.277,53.67 211.277,59.143 210.578,59.842 ; R284.1@207.088,63.09 v1(207.088,61.239) U63.16@207.95,60.54 209.88,60.54 210.578,59.842 ; v1(210.871,59.842) 210.578,59.842
  FC2 w0.15: v1@192.213,54.215 v1(192.202,54.204) 192.761,53.645 204.045,53.645 v1(204.775,52.915)
  BC1 w0.15: R79.1@189.51,53.09 189.51,53.645 ; Q31.3@192,59.09 189.382,59.09 188.976,58.684 188.976,54.737 189.51,54.203 189.51,53.645 ; v1(192.202,54.204) 190.069,54.204 189.51,53.645 ; v1(207.088,61.239) 207.52,61.672 C227.2@207.52,62.09 ; v1(210.871,59.842) 211.51,60.482 R275.1@211.51,61.09
Net-(C228-+): C228.1 Q30.3 R282.1 U54.1 | length 29.2
  FC1 w0.15: v1(176.622,166.548) 176.85,166.776 C228.1@176.85,170.49 176.85,172.314 177.51,172.974 184.506,172.974 184.95,172.53 U54.1@184.95,171.501 ; U54.1@184.95,170.953 U54.1@184.95,171.501 ; v1(188.35,171.958) 185.407,171.958 U54.1@184.95,171.501
  BC3 w0.15: v1(171.51,161.722) 173.484,161.722 173.915,162.154 173.915,163.841 v1(176.622,166.548)
  BC1 w0.15: R282.1@171.51,161.09 v1(171.51,161.722) ; Q30.3@188.35,171.09 v1(188.35,171.958)
Net-(C229--): C229.2 R235.1 U54.13 | length 22
  FC1 w0.15: v1(183.894,164.059) 184.3,164.465 U54.13@184.3,165.228
  FC2 w0.15: 169.51,157.49 169.52,157.48 169.885,157.845 172.736,157.845 172.872,157.709 181.904,157.709 v1(183.225,159.029)
  BC1 w0.15: 169.51,157.49 R235.1@169.51,158.09 ; v1(183.225,159.029) C229.2@183.225,161.09 183.744,161.09 183.894,161.239 v1(183.894,164.059)
Net-(C230--): C230.2 C257.2 U63.2 X4.2 | length 10
  FC1 w0.15: X4.2@198.25,58.19 v1(198.25,59.868) ; v1(200.355,59.563) 200.355,59.468 200.558,59.265 U63.2@202.15,59.265 v1(204.52,59.265)
  BC4 w0.15: v1(198.25,59.868) 198.555,59.563 v1(200.355,59.563)
  BC1 w0.15: v1(198.25,59.868) 198.52,59.598 C230.2@198.52,59.09 ; v1(204.52,59.265) C257.2@204.52,60.09
Net-(C232--): C232.2 C258.2 C259.2 C260.2 R284.2 U63.4 U63.13 | length 48.9
  FC1 w0.15: v1(201.775,49.845) C259.2@201.775,49.09 203.446,49.09 204.035,49.679 204.035,53.238 204.467,53.67 205.232,53.67 ; v1(204.52,61.493) 204.012,62.001 200.635,62.001 200,61.366 200,59.08 200.203,58.877 200.203,57.096 200.558,56.74 U63.4@202.15,56.74 204.419,56.74 205.003,56.156 205.003,54.788 204.902,54.686 204.902,54 205.232,53.67 ; U63.13@208,56.74 206.448,56.74 206.197,56.49 206.197,54.966 206.451,54.712 209.499,54.712 209.753,54.458 209.753,53.823 209.601,53.67 205.232,53.67 ; R284.2@208.913,63.09 208.913,62.179 v1(209.217,61.874)
  FC4 w0.15: v1(204.52,61.493) 204.901,61.874 v1(209.217,61.874)
  BC1 w0.15: C260.2@201.52,53.09 201.52,52.019 202.449,51.09 C232.2@202.525,51.09 202.525,50.187 202.183,49.845 v1(201.775,49.845) ; v1(204.52,61.493) C258.2@204.52,62.09
Net-(C233-+): C233.1 Q29.1 U53.5 | length 11.7
  BC1 w0.15: U53.5@128.84,148.04 129.455,148.04 129.87,147.625 131.674,147.625 131.928,147.371 135.035,147.371 136,148.336 Q29.1@136,149.04 136,150.444 135.775,150.669 C233.1@135.775,152.09
Net-(C234--): C234.2 Q29.2 R285.1 U53.2 | length 14.9
  BC1 w0.15: C234.2@125.52,148.09 125.52,147.523 125.952,147.091 128.422,147.091 128.88,147.549 129.615,147.549 130.073,147.09 U53.2@131.16,147.09 132.585,147.09 132.635,147.14 Q29.2@136,147.14 136,145.854 135.51,145.364 R285.1@135.51,144.09
Net-(C238-+): C238.1 Q33.1 R293.1 R297.2 | length 11.8
  FC1 w0.15: R297.2@61.82,41.83 61.82,43.053 61.85,43.083 R293.1@61.85,44.32 62.179,44.32 62.814,44.955 62.814,47.246 62.586,47.475 C238.1@61.85,47.475 61.85,47.498 v1(62.819,48.467) ; v1(62.819,49.59) Q33.1@65.05,49.59
  IC2 w0.15: v1(62.819,48.467) v1(62.819,49.59)
Net-(C238--): C93.1 C238.2 C239.2 J13.13 J13.88 J13.89 Q33.2 | length 26
  FC1 w0.15: C239.2@62.03,59.92 61.671,59.92 61.544,59.793 61.544,58.014 62.865,56.693 62.865,54.051 62.274,53.46 C93.1@61.91,53.46 61.91,51.266 61.85,51.206 C238.2@61.85,49.025 63.017,49.025 ; v1(63.652,49.025) 63.017,49.025 ; Q33.2@65.137,48.09 63.952,48.09 63.017,49.025
  BC1 w0.15: v1(63.652,49.025) 63.775,48.903 J13.88@65.207,48.903 ; J13.89@65.207,48.103 J13.88@65.207,48.903 ; J13.13@72.008,48.903 J13.88@65.207,48.903
Net-(C240-+): C240.1 Q34.1 R294.2 | length 11.2
  FC1 w0.15: R294.2@202.51,99.09 202.51,99.924 202.225,100.209 C240.1@202.225,101.09 202.225,105.258 202.734,105.767 Q34.1@206.965,105.767
Net-(C240--): C240.2 F3.2 Q34.2 | length 163.5
  FC1 w0.15: F3.2@77.4,58.09 77.4,57.169 77.622,56.947 v1(79.375,56.947) ; v1(203.775,99.898) C240.2@203.775,101.09 203.775,103.632 204.41,104.267 Q34.2@207.053,104.267
  IC4 w0.15: v1(79.375,56.947) 84.861,62.433 86.571,62.433 89.264,65.126 94.001,65.126 96.526,67.65 96.526,68.281 105.409,77.165 109.524,77.165 113.817,81.458 115.24,81.458 v1(117.373,83.591)
  FC4 w0.15: v1(117.373,83.591) 118.657,84.875 142.24,84.875 142.885,84.229 142.885,83.312 143.387,82.81 144.272,82.81 144.72,83.258 144.72,84.125 145.469,84.875 167.81,84.875 168.026,84.658 175.184,84.658 178.537,88.011 188.697,88.011 193.853,93.167 195.885,93.066 195.885,89.891 196.291,89.484 198.323,89.484 198.933,90.094 198.933,95.056 v1(203.775,99.898)
Net-(C245--): C245.2 D22.2 F1.1 Q5.1 | length 121.1
  FC2 w0.15: v1(205.4,120.266) 205.806,120.672 212.562,120.672 v1(213.225,121.335)
  BC3 w0.15: v1(182.05,59.995) 182.05,67.928 187.858,73.736 187.858,74.046 192.125,78.313 192.125,86.766 196.343,90.984 196.343,98.985 204.089,106.731 204.089,118.955 v1(205.4,120.266)
  BC1 w0.15: D22.2@182.05,56.215 v1(182.05,59.995) ; v1(205.4,120.266) F1.1@205.4,122.09 ; v1(213.225,121.335) C245.2@213.225,122.09 213.86,122.09 214.097,122.326 214.097,124.841 215.494,126.238 215.494,128.672 217.399,130.577 217.399,136.373 219.608,138.582 219.608,145.948 222.55,148.89 Q5.1@222.55,154.34
Net-(C246-+): C246.1 D20.1 Q36.3 R327.1 U59.11 | length 96.6
  FC1 w0.15: v1(155.55,63.753) 155.55,63.69 U59.11@156.8,63.69 162.154,63.69 162.509,64.046 v1@162.509,75.159 ; v1(162.408,75.159) v1@162.509,75.159 ; v1(166.573,139.09) 162.306,134.823 162.306,123.977 160.655,122.326 160.655,80.281 162.509,78.427 v1@162.509,75.159
  BC1 w0.15: v1(155.55,63.753) 156.55,63.753 D20.1@156.55,63.34 ; R327.1@157.51,74.09 157.51,75.438 157.775,75.703 C246.1@157.775,77.09 160.476,77.09 v1(162.408,75.159) ; v1(166.573,139.09) Q36.3@167.69,139.09
Net-(C257-+): C257.1 C261.1 U63.3 X4.1 | length 24.3
  FC1 w0.15: X4.1@191.75,58.19 v1(191.75,59.868) ; U63.3@202.15,57.995 203.65,57.995 ; 203.937,57.709 203.65,57.995 ; v1(203.937,58.572) 203.937,58.115 203.816,57.995 203.65,57.995
  FC2 w0.15: v1(191.75,59.868) 194.036,57.582 203.937,57.582 203.937,57.709
  BC1 w0.15: v1(203.937,58.572) 202.59,58.572 202.48,58.683 C261.1@202.48,59.09 202.48,60.147 203.013,60.681 205.232,60.681 205.48,60.433 C257.1@205.48,60.09
Net-(C264--): C264.2 U67.22 X5.2 | length 18.5
  FC1 w0.15: U67.22@208.685,77.058 208.685,76.024 v1(208.89,75.819)
  FC2 w0.15: v1(206.324,74.727) 207.797,74.727 v1(208.89,75.819)
  BC2 w0.15: v1(200.533,82.931) 202.565,82.931 v1(206.934,78.562)
  BC1 w0.15: X5.2@200.533,81.251 v1(200.533,82.931) ; v1(206.324,74.727) 206.324,76.098 206.52,76.294 C264.2@206.52,77.09 206.808,77.09 206.934,77.216 v1(206.934,78.562)
Net-(C266-Pad1): C266.1 C269.2 | length 4.8
  FC1 w0.15: v1(223.52,149.123) 224.206,149.123 224.434,149.352 v1(224.434,151.465)
  BC1 w0.15: C269.2@223.52,148.09 v1(223.52,149.123) ; v1(224.434,151.465) 224.48,151.511 C266.1@224.48,152.09
Net-(C266-Pad2): C266.2 R362.2 | length 2
  BC1 w0.15: R362.2@223.49,150.09 223.49,151.054 223.52,151.084 C266.2@223.52,152.09
Net-(C268--): C268.2 U67.23 X5.1 | length 24.2
  FC1 w0.15: U67.23@209.185,77.058 v1(209.185,78.288)
  IC1 w0.15: v1(209.185,78.288) 211.176,76.297 211.176,74.676 v1(214.097,71.755)
  IC2 w0.15: v1(200.533,73.152) 203.327,75.946 206.07,75.946 208.412,78.288 v1(209.185,78.288)
  BC1 w0.15: v1(200.533,73.152) X5.1@200.533,74.651 ; v1(214.097,71.755) C268.2@216.182,71.755
Net-(C270-Pad1): C270.1 U64.11 | length 1.6
  BC1 w0.15: v1(113.12,78.09) U64.11@114.137,78.09 ; v1(125.48,78.5) C270.1@125.48,79.09
Net-(C281--): C281.2 U75.26 X6.1 | length 45.8
  BC1 w0.15: C281.2@207.52,60.09 207.52,58.92 X6.1@208.15,58.29 209.711,58.29 211.258,56.744 211.258,53.955 211.049,53.746 211.049,51.791 212.014,50.825 212.014,45.822 212.979,44.856 212.979,42.951 212.598,42.57 212.598,24.546 214.884,22.26 U75.26@218.38,22.26
Net-(C283-+): C283.1 U75.27 X6.2 | length 39.3
  IC1 w0.15: v1(207.137,48.92) 207.137,42.723 216.535,33.325 216.535,21.316 v1(216.891,20.96)
  BC1 w0.15: v1(207.137,48.92) 208.48,50.263 C283.1@208.48,52.09 208.48,52.857 208.15,53.187 X6.2@208.15,53.99 ; v1(216.891,20.96) U75.27@218.38,20.96
Net-(D1-K): D1.2 R4.2 U2.3 | length 13.2
  FC1 w0.15: R4.2@71.51,71.09 72.238,71.09 73.363,72.215 D1.2@73.95,72.215 74.699,72.215 ; v1(74.27,63.969) 74.498,63.74 U2.3@75.25,63.74
  IC1 w0.15: v1(74.27,63.969) 74.27,71.78 74.701,72.212 74.699,72.215
Net-(D2-A): D2.2 R3.1 | length 73.6
  BC1 w0.15: R3.1@91.51,86.09 91.846,86.09 92.075,86.319 92.075,90.627 93.091,91.643 93.726,91.643 93.828,91.745 93.828,92.354 93.675,92.507 93.04,92.507 92.685,92.862 92.685,99.339 101.956,108.61 101.956,119.888 101.218,120.625 101.218,120.98 101.117,121.081 101.117,125.146 106.705,130.734 106.705,131.216 108.966,133.477 108.966,147.453 107.55,148.869 D2.2@107.55,149.34
Net-(D2-common): D2.3 Q2.1 R12.1 | length 38.3
  FC2 w0.15: v1(106.782,154.889) 107.112,154.559 109.779,154.559 110.566,155.346 131.267,155.346 132.512,156.591 134.925,156.591 135.357,157.023 v1(135.357,157.81)
  BC1 w0.15: R12.1@104.51,150.09 105.359,150.09 106.159,150.89 D2.3@107.05,150.89 106.782,151.158 v1(106.782,154.889) ; Q2.1@134.65,157.59 135.136,157.59 v1(135.357,157.81)
Net-(D2-K): D2.1 R12.2 U51.48 | length 116.2
  FC1 w0.15: v1(80.366,53.619) 80.366,52.996 81.356,52.005 U51.48@82.13,52.005
  FC3 w0.15: v1(91.999,77.826) 91.999,86.233 95.936,90.17 95.936,90.678 95.86,90.754 95.86,95.123 97.257,96.52 97.257,119.903 97.268,119.915 97.268,123.786 97.43,123.947 97.43,124.485 97.18,124.735 97.18,125.857 102.21,130.886 102.21,136.169 104.318,138.278 v1(104.318,149.352)
  FC4 w0.15: v1(104.318,149.352) 105.712,149.352 v1(106.55,148.514)
  BC4 w0.15: v1(103.49,149.49) 104.466,148.514 v1(106.55,148.514)
  BC3 w0.15: v1(80.366,53.619) 82.905,56.159 82.905,64.566 87.173,68.834 87.173,73 v1(91.999,77.826)
  BC1 w0.15: v1(103.49,149.49) R12.2@103.49,150.09 ; v1(106.55,148.514) D2.1@106.55,149.34
Net-(D3-K): D3.2 U5.6 | length 74.5
  IC3 w0.15: v1(151.841,144.79) 152.258,144.374 152.258,143.322 164.744,130.835 167.538,130.835 169.393,128.981 169.393,124.485 169.672,124.206 169.672,120.167 183.667,106.172 183.667,97.917 181.052,95.302 181.052,90.552 v1(180.317,89.816)
  BC1 w0.15: v1(151.841,144.79) U5.6@152.862,144.79 ; D3.2@179.05,88.215 179.05,88.815 180.051,89.816 v1(180.317,89.816)
Net-(D5-K): D5.2 Q6.2 R71.1 R74.1 R78.2 | length 34.4
  IC3 w0.15: 190.51,68.214 190.576,68.148 193.827,71.399 193.827,73.457 194.234,73.863 194.234,79.502 193.51,80.226 v1(193.51,82.461)
  BC2 w0.15: v1(193.51,82.461) 194.056,81.915 196.596,81.915 197.129,82.448 200.05,82.448 v1(201.879,80.62)
  BC1 w0.15: 190.51,68.214 R71.1@190.51,69.09 ; v1(193.51,82.461) R74.1@193.51,83.09 ; v1(201.879,80.62) 204.419,80.62 204.55,80.75 ; D5.2@204.05,79.215 204.05,80.01 204.55,80.51 204.55,80.75 ; R78.2@206.49,81.09 205.634,81.09 205.384,81.34 Q6.2@204.55,81.34 204.55,80.75
Net-(D7-K): D7.3 L4.2 Q4.3 | length 23.4
  FC1 w0.15: v1(210.164,150.465) D7.3@222.128,150.465 v1(222.128,147.142)
  IC1 w0.15: v1(222.128,147.142) 224.923,147.142 v1(225.05,147.015)
  BC1 w0.15: L4.2@208.48,153.75 208.48,152.149 v1(210.164,150.465) ; Q4.3@225.05,145.89 v1(225.05,147.015)
Net-(D10-A): D10.2 D13.1 | length 16.7
  BC3 w0.15: v1(110.439,83.083) 113.817,86.462 113.817,94.844 v1(114.351,95.377)
  BC1 w0.15: v1(110.439,83.083) 110.55,82.973 D13.1@110.55,81.34 ; v1(114.351,95.377) 114.55,95.576 D10.2@114.55,96.34
Net-(D10-K): C58.2 D10.1 U14.5 U15.5 | length 126.7
  FC4 w0.15: v1(113.741,98.857) 119.913,105.029 133.426,105.029 143.586,115.189 167.792,115.189 168.25,114.732 189.89,114.732 190.753,115.595 209.753,115.595 v1(215.214,121.056)
  BC1 w0.15: D10.1@113.55,96.34 113.55,98.666 v1(113.741,98.857) ; v1(215.214,121.056) 216.898,122.74 U14.5@218.15,122.74 218.186,122.74 218.186,126.486 218.44,126.74 U15.5@219.15,126.74 219.806,126.74 220.167,127.102 222.162,127.102 222.174,127.09 C58.2@223.52,127.09
Net-(D14-Pad2): D14.2 R93.1 | length 91.3
  FC2 w0.15: v1(147.447,24.168) 147.447,23.571 147.93,23.089 166.141,23.089 v1(166.548,23.495)
  BC2 w0.15: v1(86.106,43.51) 90.246,39.37 117.907,39.37 123.444,33.833 131.902,33.833 132.41,33.325 138.29,33.325 v1(147.447,24.168)
  BC1 w0.15: R93.1@85.51,44.09 85.51,43.751 85.75,43.51 v1(86.106,43.51) ; v1(166.548,23.495) 166.55,23.497 D14.2@166.55,24.34
Net-(D15-Pad2): D15.2 R95.1 | length 48.9
  FC3 w0.15: v1(153.51,64.211) 153.51,57.563 155.651,55.422 158.09,55.422 161.62,51.892 161.62,41.605 164.643,38.582 164.643,34.799 163.957,34.113 v1(163.957,23.52)
  BC1 w0.15: v1(153.51,64.211) R95.1@153.51,65.09 ; D15.2@163.55,24.34 163.55,23.927 v1(163.957,23.52)
Net-(D16-K): D16.2 U14.4 | length 67.4
  BC3 w0.15: v1(199.085,66.022) 199.085,74.498 199.542,74.955 204.343,74.955 206.451,77.064 206.451,81.178 210.541,85.268 210.541,112.954 v1(217.272,119.685)
  BC1 w0.15: D16.2@198.297,66.022 v1(199.085,66.022) ; v1(217.272,119.685) 217.272,121.31 217.401,121.44 U14.4@218.15,121.44
Net-(D17-Pad2): D17.2 U39.3 | length 28.2
  IC4 w0.15: v1(209.702,47.74) 211.76,49.797 v1(211.76,70.282)
  BC1 w0.15: U39.3@205.75,47.74 v1(209.702,47.74) ; D17.2@211.751,71.132 211.751,70.291 v1(211.76,70.282)
Net-(D17-Pad3): D17.3 R254.2 | length 47.4
  BC2 w0.15: v1(169.49,82.829) 169.896,82.423 180.797,82.423 183.337,79.883 195.859,79.883 199.669,76.073 205.604,76.073 v1(208.753,72.923)
  BC1 w0.15: v1(169.49,82.829) R254.2@169.49,84.09 ; v1(208.753,72.923) 211.251,72.923 D17.3@211.251,72.682
Net-(D18-K): D18.2 U14.2 U15.4 | length 146.1
  IC2 w0.15: 102.788,75.215 102.794,75.209 103.302,75.209 107.188,79.096 110.465,79.096 112.268,80.899 116.535,80.899 123.165,87.528 146.34,87.528 151.206,92.395 151.206,95.86 155.423,100.076 168.161,100.076 184.036,115.951 213.004,115.951 v1(218.923,121.869)
  BC1 w0.15: D18.2@102.05,75.215 102.788,75.215 ; v1(218.923,121.869) 218.923,125.44 U15.4@219.075,125.44 ; U15.4@219.15,125.44 U15.4@219.075,125.44 ; U14.2@219.85,122.09 219.21,122.09 219.075,122.225 U15.4@219.075,125.44
Net-(D19-Pad1): D19.1 D19.2 R112.2 U24.2 | length 25.1
  BC1 w0.15: D19.2@162.55,41.34 D19.1@161.55,41.34 161.55,43.485 161.66,43.595 163.347,43.595 165.938,46.186 165.938,47.574 165.811,47.701 165.481,47.701 165.227,47.955 165.227,50.952 164.592,51.587 161.747,51.587 161.087,50.927 161.087,48.242 161.239,48.09 U24.2@161.85,48.09 162.527,48.09 163.527,47.09 R112.2@164.49,47.09
Net-(D21-A-Pad3): D21.3 R31.1 | length 36.4
  FC1 w0.15: v1(106.553,85.141) 106.777,85.365 D21.3@107.3,85.365
  BC4 w0.15: v1(75.51,94.361) 78.228,91.643 100.051,91.643 v1(106.553,85.141)
  BC1 w0.15: v1(75.51,94.361) R31.1@75.51,95.09
Net-(D22-A-Pad1): D22.1 D22.3 R313.2 | length 3.7
  BC1 w0.15: R313.2@181.088,52.09 181.088,53.061 181.375,53.348 D22.1@181.375,54.365 D22.3@182.7,54.365
Net-(D23-K): D21.1 D23.1 R308.1 | length 76.9
  FC1 w0.15: D23.1@111.212,85.09 110.054,85.09 109.779,85.365 D21.1@108.625,85.365 108.625,85.928 110.668,87.971 110.668,93.116 107.874,95.91 107.874,119.304 108.102,119.532 109.753,119.532 110.109,119.888 110.109,130.581 123.495,143.967 v1(123.495,149.479)
  BC1 w0.15: v1(123.495,149.479) 123.51,149.494 R308.1@123.51,150.09
Net-(D24-K): D24.2 R132.2 R136.2 R137.2 R141.2 | length 20.6
  BC1 w0.15: D24.2@85.05,85.215 85.623,85.215 86.437,86.029 88.672,86.029 89.103,85.598 91.651,85.598 92.159,85.09 R137.2@95.49,85.09 R132.2@95.49,82.09 ; R136.2@95.49,79.09 R132.2@95.49,82.09 ; R141.2@98.49,82.09 97.742,82.09 97.257,82.575 96.218,82.575 95.733,82.09 R132.2@95.49,82.09
Net-(D25-K): D25.2 R133.2 R138.2 R140.1 R142.2 R143.1 | length 27.7
  BC1 w0.15: D25.2@88.05,85.215 89.054,85.215 91.49,82.779 91.49,81.077 ; R142.2@92.49,83.09 92.49,82.077 91.49,81.077 ; R140.1@99.51,73.09 99.51,73.355 99.162,73.355 98.755,73.762 98.298,73.762 97.79,73.254 96.723,73.254 96.51,73.467 R143.1@96.51,74.09 96.51,74.473 96.383,74.6 93.853,74.6 92.608,73.355 91.034,73.355 90.49,73.899 R138.2@90.49,75.09 90.49,77.089 91.49,78.089 R133.2@91.49,80.09 91.49,81.077
Net-(D32-A): D32.2 R129.1 | length 20.3
  FC2 w0.15: v1(192.104,64.11) 209.093,64.11 v1(209.829,63.373)
  BC1 w0.15: v1(192.104,64.11) 192.51,64.516 R129.1@192.51,65.09 ; D32.2@209.55,64.34 209.55,63.652 v1(209.829,63.373)
Net-(D32-common): D32.3 Q18.1 R180.1 | length 11.5
  BC1 w0.15: R180.1@206.51,65.09 207.366,65.09 208.166,65.89 D32.3@209.05,65.89 209.05,67.64 209.093,67.683 Q18.1@215.915,67.683
Net-(D33-Pad3): D33.3 R114.2 | length 42.9
  BC1 w0.15: R114.2@181.49,68.09 181.49,67.024 182.321,66.192 184.506,66.192 185.014,65.684 185.014,64.211 185.572,63.652 190.322,63.652 190.983,62.992 190.983,61.163 190.703,60.884 190.246,60.884 187.35,57.988 187.35,51.664 187.757,51.257 189.89,51.257 190.017,51.13 190.017,48.235 187.96,46.177 187.96,42.444 187.322,41.806 187.322,39.728 187.96,39.09 D33.3@188.35,39.09
Net-(D36-K): D36.1 L14.2 R236.2 | length 151.9
  FC2 w0.15: v1(103.49,30.582) 111.658,30.582 112.573,31.496 v1(115.12,31.496)
  FC3 w0.15: v1(116.992,32.588) 116.992,48.006 130.185,61.199 130.185,84.125 130.705,84.645 131.33,84.645 132.25,85.564 132.25,89.955 132.029,90.175 v1(132.029,143.18)
  IC4 w0.15: v1(132.029,143.18) 133.045,143.18 136.754,146.888 140.462,146.888 143.408,149.835 v1(145.991,149.835)
  BC1 w0.15: v1(103.49,30.582) R236.2@103.49,32.09 ; v1(115.12,31.496) 116.213,32.588 L14.2@116.213,32.969 ; L14.2@116.213,33.09 L14.2@116.213,32.969 ; v1(116.992,32.588) 116.611,32.969 L14.2@116.213,32.969 ; D36.1@145.788,151.09 145.788,150.444 145.991,150.241 v1(145.991,149.835)
Net-(D38-A): D38.2 Q21.3 | length 6
  BC1 w0.15: D38.2@103.212,139.09 103.212,139.572 104.114,139.572 105.105,140.564 105.105,141.938 104.953,142.09 Q21.3@103.35,142.09
Net-(D38-K): D38.1 R232.2 | length 90.7
  IC2 w0.15: v1(104.572,137.922) 105.181,138.532 116.942,138.532 123.774,145.364 123.774,147.625 124.358,148.209 126.695,148.209 129.464,150.978 140.97,150.978 144.856,154.864 153.416,154.864 v1(158.293,159.741)
  FC4 w0.15: v1(158.293,159.741) 159.156,158.877 v1(182.499,158.877)
  BC1 w0.15: v1(104.572,137.922) 104.787,138.138 D38.1@104.787,139.09 ; R232.2@182.49,158.09 182.49,158.868 v1(182.499,158.877)
Net-(D39-A): D39.2 D55.2 J13.46 J13.48 | length 84.2
  FC1 w0.15: v1(85.674,95.098) 85.954,95.377 85.954,118.677 83.922,120.709 83.922,128.829 84.684,129.591 84.684,144.608 85.115,145.04 D55.2@87.15,145.04 D39.2@87.15,148.04
  BC3 w0.15: v1(75.133,78.07) 75.133,82.779 81.864,89.51 81.864,91.491 85.471,95.098 v1(85.674,95.098)
  BC1 w0.15: J13.46@72.008,75.353 72.99,75.353 73.127,75.489 73.127,76.81 72.984,76.953 ; J13.48@72.008,76.953 72.984,76.953 ; v1(75.133,78.07) 74.016,76.953 72.984,76.953
Net-(D41-K): D41.1 R260.1 R266.2 R271.2 U50.2 | length 42
  FC1 w0.15: 204.828,42.09 U50.2@206.862,42.09
  FC3 w0.15: v1(201.701,61.493) 201.701,50.978 203.86,48.819 203.86,42.979 204.749,42.09
  BC2 w0.15: 204.749,42.09 204.749,42.012 ; 204.828,42.09 204.749,42.012 ; v1(214.147,42.012) 204.749,42.012
  BC1 w0.15: R266.2@201.49,62.09 201.49,61.705 v1(201.701,61.493) ; R260.1@213.51,44.09 214.579,44.09 214.787,43.882 214.787,41.803 ; v1(214.147,42.012) 214.579,42.012 214.787,41.803 ; R271.2@218.49,42.09 217.129,42.09 216.129,41.09 D41.1@214.787,41.09 214.787,41.803
Net-(D42-Pad1): D42.1 D42.2 D43.1 D43.2 R287.1 U52.2 | length 11.7
  BC1 w0.15: R287.1@77.51,149.09 79.164,149.09 79.629,149.555 79.629,151.912 79.451,152.09 ; U52.2@78.85,152.09 79.451,152.09 ; D43.2@85.55,152.34 D43.1@84.55,152.34 D42.2@82.55,152.34 D42.1@81.55,152.34 80.819,152.34 80.569,152.09 79.451,152.09